# Allegro board MIPI_RGB_163.brd
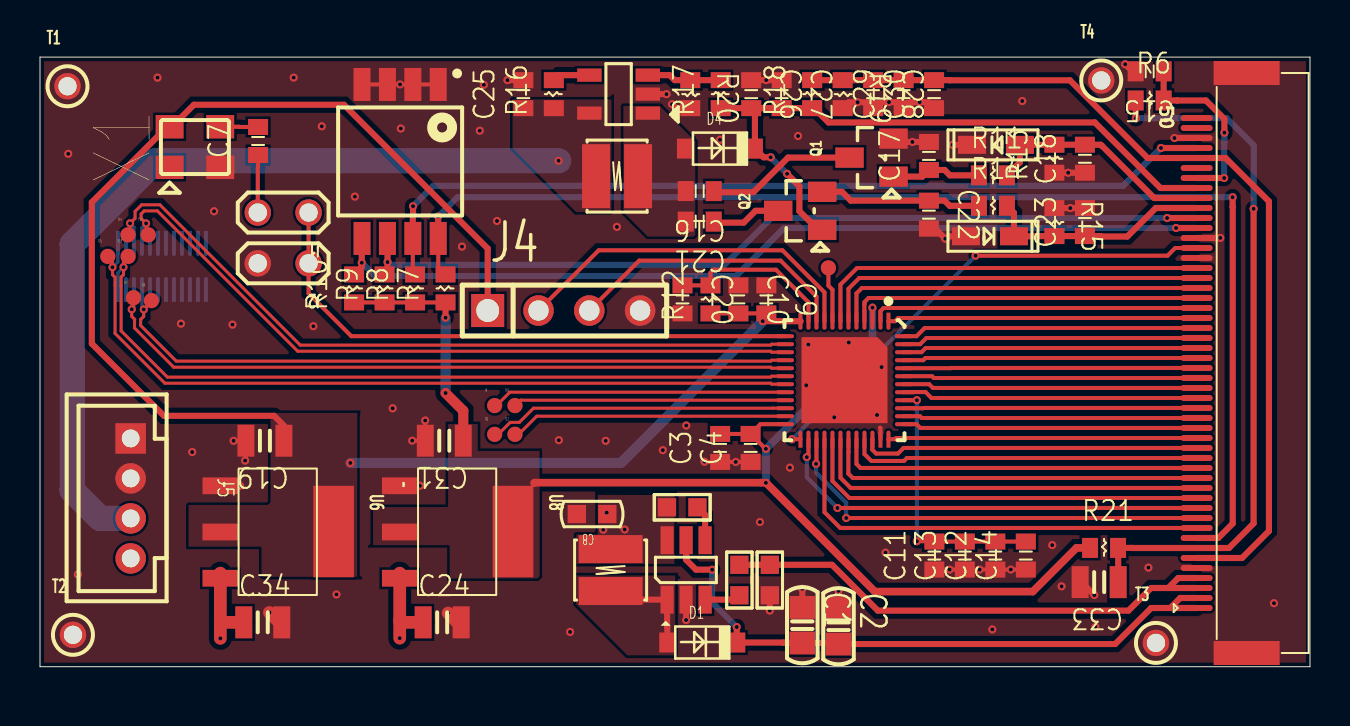
[diagram p0: board, top side]
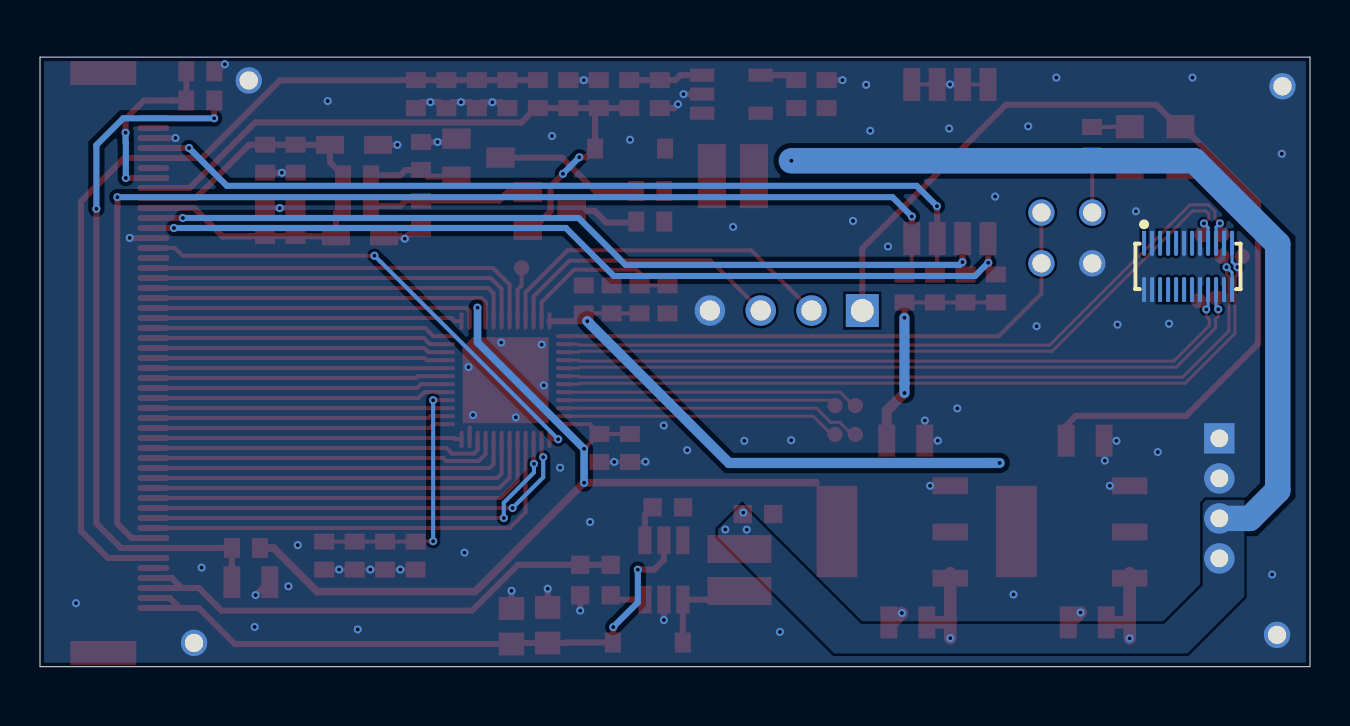
[diagram p1: board, bottom side, seen from below]

Outline 63.5 x 30.48 mm; copper layers: TOP, BOTTOM. Coordinates in mm from the lower left corner of the outline.
Outline path: 0,30.48 0,0 63.5,0 63.5,30.48 0,30.48

## Design rules (mm)
net group DSI_B0: nets DSI_B0N DSI_B0P
net group DSI_B1: nets DSI_B1N DSI_B1P
net group DSI_BC: nets DSI_BCN DSI_BCP

## Placement (name value [footprint] x y rotation side)
C1  4.7uF/1uF  [SC0805]  38.11 2.08 270 top
C2  4.7uF/1uF  [SC0805]  39.93 2.02 270 top
C3  1UF  [SMDCAP0603]  34.01 10.94 90 top
C4  10NF  [SMDCAP0603]  35.53 10.94 90 top
C7  1NF  [SMDCAP0603]  10.9 26.29 90 top
C8  4.7uF  [SC0603]  28.37 7.63 180 top
C9  1UF  [SMDCAP0603]  36.32 18.37 270 top
C10  10NF  [SMDCAP0603]  34.92 18.37 270 top
C11  1UF  [SMDCAP0603]  44.72 5.56 90 top
C12  1UF  [SMDCAP0603]  47.77 5.56 90 top
C13  10NF  [SMDCAP0603]  46.24 5.56 90 top
C14  10NF  [SMDCAP0603]  49.29 5.56 90 top
C15  1.0uF  [SMDCAP0603]  55.48 29.77 180 top
C16  100nF  [SMDCAP0603]  32.99 23.78 180 top
C17  1.0uF  [SMDCAP0603]  44.45 25.54 90 top
C18  100nF  [SMDCAP0603]  52.25 25.4 90 top
C19  10UF  [SMDCAP0805]  11.24 11.3 180 top
C20  200NF  [SMDCAP0603]  32.13 18.37 270 top
C21  100nF  [SMDCAP0603]  32.99 22.26 180 top
C22  1.0uF  [SMDCAP0603]  44.45 22.6 270 top
C23  1.0uF  [SMDCAP0603]  52.25 22.23 90 top
C24  10UF  [SMDCAP0805]  20.11 2.22 0 top
C25  1.0uF  [SMDCAP0603]  24.17 28.63 90 top
C26  1.0uF  [SMDCAP0603]  35.56 28.63 270 top
C27  100nF  [SMDCAP0603]  37.08 28.63 270 top
C28  4.7uF  [SMDCAP0603]  41.66 28.63 270 top
C29  100nF  [SMDCAP0603]  43.18 28.63 90 top
C30  100nF  [SMDCAP0603]  44.7 28.63 90 top
C31  10UF  [SMDCAP0805]  20.21 11.3 180 top
C33  10UF  [SMDCAP0805]  52.96 4.23 180 top
C34  10UF  [SMDCAP0805]  11.14 2.22 0 top
D1  IN5819HW  [SOD123]  31.36 1.21 0 top
D2  UDZS6.8B  [SOD-323]  47.8 26.09 270 top
D3  UDZS18B  [SOD-323]  47.5 21.52 90 top
D4  IN5819HW  [SOD123]  32.25 25.91 0 top
J1  JUMPER  [JUMPER_2_54]  12.16 22.71 180 top
J2  JUMPER  [JUMPER_2_54]  12.16 20.17 180 top
J3  F4C50U-A1XD-R  [FPC50-0_5-4_428_1-B]  59.08 15.19 270 top
J4  CON4  [SIP4_2_54]  22.38 17.81 0 top
J5  CON4  [HDR1X4_2]  3.83 4.41 270 top
L1  22uH  [PL3030]  28.53 4.83 270 top
L2  22uH  [PL3030]  28.86 24.53 0 top
NOREF  -  []  0 30.48 0 top
NOREF#2  -  []  0 0 90 top
Q1  BAT54S  [SOT-23]  41.58 25.45 90 top
Q2  BAT54S  [SOT-23]  38.01 22.79 90 top
R2  10K  [SR0603]  31.35 7.97 0 top
R4  4.7K  [SR0603]  34.97 3.57 90 top
R5  3.3  [SR0603]  36.49 5.09 270 top
R6  10K  [SMDRES0603]  55.48 28.31 0 top
R7  10K  [SMDRES0603]  20.28 18.91 90 top
R8  10K  [SMDRES0603]  18.75 18.91 90 top
R9  10K  [SMDRES0603]  17.23 18.91 90 top
R10  10K  [SMDRES0603]  15.71 18.91 90 top
R11  1K  [SMDRES0603]  47.65 24.57 0 top
R12  1K  [SMDRES0603]  33.52 18.37 90 top
R13  10K  [SMDRES0603]  50.72 25.4 90 top
R14  1K  [SMDRES0603]  47.65 23.04 0 top
R15  47K  [SMDRES0603]  50.72 22.23 270 top
R16  10K  [SMDRES0603]  25.69 28.63 90 top
R17  33K,1%  [SMDRES0603]  34.04 28.63 90 top
R18  56K,1%  [SMDRES0603]  38.61 28.63 90 top
R19  33K,1%  [SMDRES0603]  40.13 28.63 270 top
R20  4.7K,1%  [SMDRES0603]  32.51 28.63 270 top
R21  0  [SMDRES0603]  53.2 5.94 0 top
SW1  SWITCH_SMT4  [SW_4BIT_1_27]  18.01 25.26 270 top
T1  TEST POINT  [TEST_POINT]  1.38 29.02 0 top
T2  TEST POINT  [TEST_POINT]  1.65 1.59 0 top
T3  TEST POINT  [TEST_POINT]  55.8 1.19 0 top
T4  TEST POINT  [TEST_POINT]  53.06 29.31 0 top
T8  TEST POINT  [TP_30]  39.42 19.94 0 top
T9  TEST POINT  [TP_30]  22.73 13.06 0 top
T10  TEST POINT  [TP_30]  23.75 13.06 0 top
T11  TEST POINT  [TP_30]  22.73 11.62 0 top
T12  TEST POINT  [TP_30]  23.75 11.62 0 top
T13  TEST POINT  [TP_30]  5.41 21.59 0 top
T14  TEST POINT  [TP_30]  4.4 21.59 0 top
T15  TEST POINT  [TP_30]  3.39 20.52 0 top
T16  TEST POINT  [TP_30]  5.57 18.31 0 top
T17  TEST POINT  [TP_30]  4.68 18.45 0 top
T18  TEST POINT  [TP_30]  4.41 20.52 0 top
U1  AP3031KTR-G  [SOT-23-6]  32.3 4.84 0 top
U6  1117_1.8  [SOT223]  9.02 9.05 270 top
U7  AP3012  [SOT-23-5]  28.93 28.63 90 top
U8  1117_3.3  [SOT223]  17.99 9.05 270 top
U10  ICN6211  [QFN48_04]  40.22 14.33 270 top
U11  -  [DF37NC_24]  6.1 20.02 90 bottom
X1  CRYSTAL_4pin  [CRY4_3225]  7.75 25.98 90 top

## Library data of the parts
C1-C4 C7-C31 C33 C34 = CAP
D1 D4 = Diode_Schottky
D2 D3 = Diode_zener
J1 J2 = JUMPER
J3 = J_FPC-50P
J4 J5 = CON4
L1 L2 = Inductor
Q1 Q2 = Diode_SOT23
R2 R4-R11 R13-R21 = RES
R12 = RESISTOR
SW1 = SWITCH_SMT4
T1-T4 T8-T18 = TEST POINT
U1 = U_AP3031
U6 U8 = 1117
U7 = U_AP3012
U10 = ICN6211
U11 = DF37NC_0
X1 = CRYSTAL_4pin

## Footprints (pads in the part's own frame, mm; a bottom-side part is the same pattern mirrored in y, then rotated)
CRY4_3225
  rect 1.168x1.397 smd: 1(-1.015,1.265) 2(-1.015,-1.265) 3(1.015,-1.265) 4(1.015,1.265)
DF37NC_24
  custom 1.25x0.2 smd: 1(1.15,2.2) 2(1.15,1.8) 3(1.15,1.4) 4(1.15,1) 5(1.15,0.6) 6(1.15,0.2) 7(1.15,-0.2) 8(1.15,-0.6) 9(1.15,-1) 10(1.15,-1.4) 11(1.15,-1.8) 12(1.15,-2.2) 13(-1.15,-2.2) 14(-1.15,-1.8) 15(-1.15,-1.4) 16(-1.15,-1) 17(-1.15,-0.6) 18(-1.15,-0.2) 19(-1.15,0.2) 20(-1.15,0.6) 21(-1.15,1) 22(-1.15,1.4) 23(-1.15,1.8) 24(-1.15,2.2)
FPC50-0_5-4_428_1-B
  oval 0.3x1.6 smd: 1(12.25,-1.25) 2(11.75,-1.25) 3(11.25,-1.25) 4(10.75,-1.25) 5(10.25,-1.25) 6(9.75,-1.25) 7(9.25,-1.25) 8(8.75,-1.25) 9(8.25,-1.25) 10(7.75,-1.25) 11(7.25,-1.25) 12(6.75,-1.25) 13(6.25,-1.25) 14(5.75,-1.25) 15(5.25,-1.25) 16(4.75,-1.25) 17(4.25,-1.25) 18(3.75,-1.25) 19(3.25,-1.25) 20(2.75,-1.25) 21(2.25,-1.25) 22(1.75,-1.25) 23(1.25,-1.25) 24(0.75,-1.25) 25(0.25,-1.25) 26(-0.25,-1.25) 27(-0.75,-1.25) 28(-1.25,-1.25) 29(-1.75,-1.25) 30(-2.25,-1.25) 31(-2.75,-1.25) 32(-3.25,-1.25) 33(-3.75,-1.25) 34(-4.25,-1.25) 35(-4.75,-1.25) 36(-5.25,-1.25) 37(-5.75,-1.25) 38(-6.25,-1.25) 39(-6.75,-1.25) 40(-7.25,-1.25) 41(-7.75,-1.25) 42(-8.25,-1.25) 43(-8.75,-1.25) 44(-9.25,-1.25) 45(-9.75,-1.25) 46(-10.25,-1.25) 47(-10.75,-1.25) 48(-11.25,-1.25) 49(-11.75,-1.25) 50(-12.25,-1.25)
  rect 1.2x3.3 smd: 51(-14.5,1.25) 52(14.5,1.25)
HDR1X4_2
  rect 1.524x1.524 hole 0.889: 1(-7,0.7)
  round 1.524 hole 0.889: 2(-5,0.7) 3(-3,0.7) 4(-1,0.7)
JUMPER_2_54
  round 1.321 hole 0.914: 1(-1.27,0) 2(1.27,0)
PL3030
  rect 1.4x3.2 smd: 1(-1.05,0) 2(1.05,0)
QFN48_04
  custom 0.85x0.2 smd: 1(-2.95,2.2) 2(-2.95,1.8) 3(-2.95,1.4) 4(-2.95,1) 5(-2.95,0.6) 6(-2.95,0.2) 7(-2.95,-0.2) 8(-2.95,-0.6) 9(-2.95,-1) 10(-2.95,-1.4) 11(-2.95,-1.8) 12(-2.95,-2.2) 25(2.95,-2.2) 26(2.95,-1.8) 27(2.95,-1.4) 28(2.95,-1) 29(2.95,-0.6) 30(2.95,-0.2) 31(2.95,0.2) 32(2.95,0.6) 33(2.95,1) 34(2.95,1.4) 35(2.95,1.8) 36(2.95,2.2)
  custom 0.2x0.85 smd: 13(-2.2,-2.95) 14(-1.8,-2.95) 15(-1.4,-2.95) 16(-1,-2.95) 17(-0.6,-2.95) 18(-0.2,-2.95) 19(0.2,-2.95) 20(0.6,-2.95) 21(1,-2.95) 22(1.4,-2.95) 23(1.8,-2.95) 24(2.2,-2.95) 37(2.2,2.95) 38(1.8,2.95) 39(1.4,2.95) 40(1,2.95) 41(0.6,2.95) 42(0.2,2.95) 43(-0.2,2.95) 44(-0.6,2.95) 45(-1,2.95) 46(-1.4,2.95) 47(-1.8,2.95) 48(-2.2,2.95)
  custom 4.3x4.3 smd: 49(0,0)
SC0603
  rect 0.914x0.914 smd: 1(0,0) 2(1.524,0)
SC0805
  rect 1.143x1.27 smd: 1(-0.889,0) 2(0.889,0)
SIP4_2_54
  rect 1.651x1.651 hole 1.143: 1(0,0)
  round 1.524 hole 1.016: 2(2.54,0) 3(5.08,0) 4(7.62,0)
SMDCAP0603
  rect 0.8x1 smd: 1(-0.7,0) 2(0.7,0)
SMDCAP0805
  rect 0.85x1.6 smd: 1(-0.95,0) 2(0.95,0)
SMDRES0603
  rect 0.8x1 smd: 1(-0.7,0) 2(0.7,0)
SOD123
  rect 0.8x1 smd: 1(0,0) 2(3.5,0)
SOD-323
  rect 0.9x1.4 smd: 1(0,1.2) 2(0,-1.2)
SOT223
  rect 0.838x1.778 smd: 1(0,0) 2(2.311,0) 3(4.623,0)
  rect 4.572x2.032 smd: 4(2.286,5.664)
SOT-23
  rect 1.016x1.422 smd: 1(-0.95,-1.1) 2(0.95,-1.1) 3(0,1.1)
SOT-23-5
  rect 0.66x1.219 smd: 1(-0.95,-1.46) 2(0,-1.46) 3(0.95,-1.46) 4(0.95,1.46) 5(-0.95,1.46)
SOT-23-6
  rect 0.66x1.397 smd: 1(-0.94,-1.486) 2(0.01,-1.486) 3(0.96,-1.486) 4(0.96,1.486) 5(0.01,1.486) 6(-0.94,1.486)
SR0603
  rect 0.914x0.914 smd: 1(0,0) 2(1.524,0)
SW_4BIT_1_27
  rect 1.65x0.85 smd: 1(-3.85,1.905) 2(-3.85,0.635) 3(-3.85,-0.635) 4(-3.85,-1.905) 5(3.85,-1.905) 6(3.85,-0.635) 7(3.85,0.635) 8(3.85,1.905)
TEST_POINT
  round 1.321 hole 0.914: 1(0,0)
TP_30
  round 0.762 smd: 1(0,0)

## Nets
1V8: C9.2 C10.2 C19.1 J4.1 R12.1 U6.2(OUT_1) U6.4(OUT_2) U10.12(VDD1) X1.4(VDD)
3V3: C3.2 C4.2 C31.1 R7.1 R8.1 R9.1 R10.1 R21.1 U8.2(OUT_1) U8.4(OUT_2) U10.3(VDD3) U10.24(VDD2)
GND: C1.1 C2.1 C3.1 C4.1 C8.2 C9.1 C10.1 C11.1 C12.1 C13.1 C14.1 C15.2 C17.2 C18.1 C19.2 C20.2 C22.2 C23.2 C24.2 C25.2 C26.1 C27.1 C28.2 C29.1 C30.1 C31.2 C33.2 C34.2 D2.2 D3.1 J2.2 J3.5 J3.36 J3.38 J3.48 J3.51 J3.52 J4.4 J5.1 J5.2 Q1.2 R5.2 R13.1 R15.1 R19.2 R20.2 SW1.1 SW1.2 SW1.3 SW1.4 T1.1 T2.1 T3.1 T4.1 U1.2(GND) U6.1(ADJ/GND) U7.2(GND) U8.1(ADJ/GND) U10.35(GND) U10.49(E_PAD) U11.2 U11.6 U11.8 U11.11 U11.14 U11.17 U11.23 U11.24 X1.2(GND)
VCC_5V: C8.1 C24.1 C25.1 C34.1 J5.3 J5.4 L1.1 L2.1 R2.1 R16.1 U1.6(VIN) U6.3(IN) U7.5(VIN) U8.3(IN)
DATA_DE: J3.9 U10.28(DATA_DE)
DITH: J3.47 R8.2 SW1.7
DSI_B0N: T13.1 U10.15(DA0N) U11.9
DSI_B0P: T14.1 U10.14(DA0P) U11.10
DSI_B1N: T17.1 U10.17(DA1N) U11.15
DSI_B1P: T16.1 U10.16(DA1P) U11.16
DSI_BCN: T15.1 U10.19(DACN) U11.12
DSI_BCP: T18.1 U10.18(DACP) U11.13
HSYNC: J3.11 U10.26(HSYNC)
LCD_AVDD: C26.2 C27.2 D4.2(-) J3.43 Q2.1(G) R17.1 R18.1
LCD_RST: C15.1 J3.44 R6.2
LCD_VCOM: C28.1 C29.2 C30.2 J3.6 J3.46 R18.2 R19.1
LCD_VGH: C23.1 D3.2 J3.41 R14.2 R15.2
LCD_VGL: C18.2 D2.1 J3.42 R11.2 R13.2
MODE: J3.8 R7.2 SW1.8
PANEL_VDD: C33.1 J3.7 R6.1 R21.2
PCLK: J3.37 U10.25(PCLK)
REFCLK: J1.1 J2.1 U10.13(REF_CLK)
RESET: C20.1 R12.2 U10.11(EN)
RGB_DATA0: J3.12 U10.29(DATA0)
RGB_DATA1: J3.13 U10.30(DATA1)
RGB_DATA2: J3.14 U10.31(DATA2)
RGB_DATA3: J3.15 U10.32(DATA3)
RGB_DATA4: J3.16 U10.33(DATA4)
RGB_DATA5: J3.17 U10.34(DATA5)
RGB_DATA6: J3.18 U10.36(DATA6)
RGB_DATA7: J3.19 U10.37(DATA7)
RGB_DATA8: J3.20 U10.38(DATA8)
RGB_DATA9: J3.21 U10.39(DATA9)
RGB_DATA10: J3.22 U10.41(DATA10)
RGB_DATA11: J3.23 U10.42(DATA11)
RGB_DATA12: J3.24 U10.43(DATA12)
RGB_DATA13: J3.25 U10.44(DATA13)
RGB_DATA14: J3.26 U10.45(DATA14)
RGB_DATA15: J3.27 U10.46(DATA15)
RGB_DATA16: J3.28 U10.47(DATA16)
RGB_DATA17: J3.29 U10.48(DATA17)
RGB_DATA18: J3.30 U10.1(DATA18)
RGB_DATA19: J3.31 U10.2(DATA19)
RGB_DATA20: J3.32 U10.4(DATA20)
RGB_DATA21: J3.33 U10.5(DATA21)
RGB_DATA22: J3.34 U10.6(DATA22)
RGB_DATA23: J3.35 U10.7(DATA23)
SCL: J4.2 U10.9(SCL)
SDA: J4.3 U10.10(SDA)
SHLR: J3.39 R10.2 SW1.5
UPDN: J3.40 R9.2 SW1.6
VLED+: C1.2 C2.2 D1.2(-) J3.1 J3.2 U1.5(OVP)
VLED-: J3.3 J3.4 R4.2 R5.1
VSYNC: J3.10 U10.27(VSYNC)
N16776933: C7.2 X1.3(OUT)
N16776937: C7.1 J1.2
N16777143: D1.1(+) L1.2 U1.1(LX)
N16777199: R4.1 U1.3(FB)
N16777260: R2.2 U1.4(EN)
N16777403: T8.1 U10.8(TEST)
N16777626: C11.2 C12.2 C13.2 C14.2 U10.40(VCORE)
N16778328: C22.1 Q2.2 R14.1
N16778388: C17.1 Q1.1(G) R11.1
N16778390: R17.2 R20.1 U7.3(FB)
N16778392: C21.1 Q2.3
N16778398: C16.2 C21.2 D4.1(+) L2.2 U7.1(SW)
N16778500: R16.2 U7.4(S\H\D\N\)
N16778756: C16.1 Q1.3
N16796361: T9.1 U10.20(DA2P)
N16796365: T10.1 U10.21(DA2N)
N16796369: T11.1 U10.22(DA3P)
N16796373: T12.1 U10.23(DA3N)

Pads without a net: J3 45 49 50; U11 1 3 4 5 7 18 19 20 21 22; X1 1

## Via types
v1: diameter 0.406, hole 0.203, TOP to BOTTOM, 119 vias

## Routing (per net, layer and track width the routed paths; a pad name or vN(x,y) marks a point on that pad's centre or on a via; arc(x,y) is an arc through that point)
1V8: length 75
  TOP w0.203: v1(36.14,17.28) 36.14,17.49 C9.2 C10.2 R12.1
  TOP w0.305: 12.19,12.06 11.71,12.54 6.2,12.54 2.59,16.15 2.59,23.22 6.37,27 X1.4 6.59,27 7.69,28.1 15.2,28.1 22.38,20.91 J4.1 ; v1(36.14,17.28) U10.12
  BOTTOM w0.508: v1(36.14,17.28) 29.05,10.19 16.1,10.19 v1(15.52,10.19)
3V3: length 59.3
  TOP w0.203: R10.1 R9.1 R8.1 R7.1 ; 36.03,9.2 36.04,9.19 v1(36.3,9.19) ; C4.2 36.02,12.13 U10.24 ; C4.2 36.28,10.89 v1(36.3,10.89) ; C4.2 C3.2 ; U10.3 v1(41.62,17.95)
  TOP w0.305: R7.1 v1(20.28,17.45)
  TOP w0.381: R21.1 51.82,5.94 49.64,3.75 41.75,3.75 36.3,9.2 24.73,9.2 24.7,9.18
  TOP w0.508: C31.1 21.16,12.8 v1(20.28,13.68)
  BOTTOM w0.381: v1(41.62,17.95) 41.62,16.22 v1(36.3,10.89) v1(36.3,9.19)
  BOTTOM w0.508: v1(20.28,13.68) 20.28,14.17 v1(20.28,17.45)
GND: length 43.3
  TOP w0.203: C11.1 v1(45.48,4.86) C13.1 v1(46.98,4.86) C12.1 v1(48.54,4.86) C14.1 ; U10.35 42.02,11.93 42,11.96 ; v1(10.26,10.3) 10.29,10.34 C19.2 9.68,11.3 v1(9.68,11.29) ; SW1.4 SW1.3 18,29.11 v1(18,29.12) 18,29.11 SW1.2 SW1.1 ; v1(18.99,9.05) U8.1 ; v1(19.26,12.31) 19.26,12.3 C31.2 18.61,11.3 v1(18.61,11.3) ; C4.1 v1(34.79,10.24) C3.1 33.24,10.24 v1(33.23,10.25) ; U6.1 v1(10.01,9.05)
  TOP w0.305: Q1.2 42.84,26.24 v1(43.62,26.24) C17.2 ; C1.1 v1(38.11,3.9) ; R19.2 40.15,27.93 40.44,28.22 v1(40.88,28.22) 41.36,28.22 C28.2 41.71,27.93 42.01,28.23 v1(42.45,28.23) 42.88,28.23 C29.1 43.23,27.93 43.53,28.23 v1(43.98,28.23) 44.4,28.23 C30.1 ; D2.2 v1(45.63,26.09) ; C22.2 44.76,21.9 v1(45.26,21.4) 45.34,21.4 45.46,21.52 D3.1 ; C33.2 52.07,4.23 v1(52.72,3.58) ; R20.2 31.79,27.93 v1(31.6,28.12) ; v1(54.26,30.12) 54.61,29.77 C15.2 ; J3.38 59.01,21.44 v1(59.02,21.44) ; C25.2 v1(23.37,29.33) ; C18.1 v1(51.41,24.7) R13.1 ; C27.1 v1(36.31,29.33) C26.1 ; C2.1 v1(39.93,3.79) ; R5.2 v1(36.49,2.8) ; R15.1 v1(51.52,22.93) C23.2 ; U1.2 v1(32.31,2.33) ; J3.48 v1(56.72,26.44) ; U7.2 v1(31.32,28.63)
  TOP w0.635: v1(11.47,2.71) 11.96,2.22 C34.2 ; v1(20.41,2.68) 20.87,2.22 C24.2
  vias: v1(1.41,25.64) v1(1.89,4.61) v1(5.88,29.45) v1(7.05,17.15) v1(7.61,10.73) v1(8.7,22.77) v1(9.62,17.1) v1(12.68,29.45) v1(13.67,17.03) v1(14.09,27.02) v1(14.82,3.61) v1(15.74,23.51) v1(17.63,12.92) v1(18.04,26.91) v1(21.1,21.01) v1(21.99,26.8) v1(22.19,29.1) v1(22.85,22.29) v1(25.94,11.33) v1(26.5,1.74) v1(28.28,11.29) v1(28.85,21.99) v1(31.14,10.83) v1(32.31,12.06) v1(34,26.35) v1(36,7.23) v1(37.5,9.95) v1(37.9,26.53) v1(38.31,14.07) v1(38.42,16.11) v1(39.71,12.47) v1(40.44,16.21) v1(41.85,12.59) v1(42.08,14.98) v1(42.27,5.7) v1(47.61,1.86) v1(49.11,28.28) v1(50.61,6.08) v1(51.08,4.02) v1(52.77,1.99) v1(55.42,4.96) v1(61.7,3.17)
VCC_5V: length 50.8
  TOP w0.635: 9.02,2.19 U6.3 9.02,4.68 ; 9.02,2.19 9.04,2.22 C34.1 ; 9.02,2.19 v1(9.02,1.42) ; 17.99,2.3 18.07,2.22 C24.1 ; 17.99,2.3 U8.3 17.99,4.68 ; 17.99,2.3 v1(17.99,1.43)
  BOTTOM w1.27: J5.3 3.01,7.41 1.61,8.81 1.61,21.13 5.78,25.3 v1(25.93,25.3)
  vias: v1(28.16,6.85) v1(28.34,7.71) v1(29.23,6.86)
DATA_DE: length 22.6
  TOP w0.203: U10.28 39.22,7.73 40.02,6.94 J3.9
DITH: length 43.8
  TOP w0.203: SW1.7 18.64,19.73 R8.2
  TOP w0.305: v1(18.65,23.03) 18.65,22.54 18.64,22.53 SW1.7 ; J3.47 v1(56.05,25.94)
  BOTTOM w0.305: v1(56.05,25.94) 54.16,24.04 19.67,24.04 v1(18.65,23.03)
DSI_B0N: length 37.5
  TOP w0.152: U10.15 36.58,15.73 36.54,15.77 12.89,15.77 5.87,22.79 5.21,22.79 5.06,22.64 5.06,22.41 v1(5.3,22.16) 5.3,22.16 5.3,21.77 5.41,21.66 T13.1
  BOTTOM w0.152: U11.9 5.1,21.96 v1(5.3,22.16)
DSI_B0P: length 38
  TOP w0.152: T14.1 4.4,21.67 4.5,21.77 4.5,22.17 v1(4.5,22.17) 4.75,22.42 4.75,22.77 5.08,23.1 6,23.1 13.01,16.08 36.54,16.08 36.59,16.13 U10.14
  BOTTOM w0.152: U11.10 4.7,21.97 v1(4.5,22.17)
DSI_B1N: length 36
  TOP w0.152: T17.1 4.68,17.96 v1(4.59,17.87) 4.58,17.52 4.73,17.37 4.72,16.94 6.69,14.97 36.54,14.97 36.59,14.93 U10.17
  BOTTOM w0.152: U11.15 4.7,17.98 4.59,17.87 v1(4.59,17.87)
DSI_B1P: length 35.5
  TOP w0.152: T16.1 5.57,18.25 v1(5.19,17.86) 5.18,17.51 5.03,17.37 5.03,17.06 6.81,15.28 36.54,15.28 36.58,15.33 U10.16
  BOTTOM w0.152: U11.16 5.1,17.96 v1(5.19,17.86)
DSI_BCN: length 39.9
  TOP w0.152: T15.1 3.63,20.28 v1(3.63,19.97) 3.63,19.6 3.75,19.48 3.75,19.07 3.75,16.66 6.24,14.17 36.54,14.17 36.58,14.13 U10.19
  BOTTOM w0.152: v1(3.63,19.97) 3.63,19.97 3.9,20.24 U11.12
DSI_BCP: length 39.3
  TOP w0.152: T18.1 4.17,20.28 v1(4.17,19.98) 4.18,19.6 4.06,19.48 4.06,19.07 4.06,16.79 6.37,14.48 36.54,14.48 36.58,14.53 U10.18
  BOTTOM w0.152: U11.13 3.9,19.7 v1(4.17,19.98)
HSYNC: length 22.1
  TOP w0.203: J3.11 v1(39.87,7.94) ; v1(38.34,10.48) 38.42,10.56 U10.26
  BOTTOM w0.203: v1(39.87,7.94) 38.34,9.47 v1(38.34,10.48)
LCD_AVDD: length 33.3
  TOP w0.305: C26.2 C27.2 R18.1 38.71,27.93 39.43,27.21 52.74,27.21 56.02,23.94 J3.43 ; C26.2 R17.1 ; C26.2 35.75,27.74 D4.2 36.18,25.47 v1(36.53,25.47) ; Q2.1 38.91,21.84 37.97,22.78 37.97,24.01 37.7,24.29 37.7,24.3 v1(37.35,24.65)
  BOTTOM w0.305: v1(36.53,25.47) 37.01,24.99 37.01,24.99 v1(37.35,24.65)
LCD_RST: length 9.2
  TOP w0.305: J3.44 v1(59.21,24.44) ; C15.1 R6.2 56.86,28.31 56.87,28.31 58.3,28.31 59.22,27.39 v1(59.22,26.7)
  BOTTOM w0.305: v1(59.22,26.7) 59.22,26.22 59.21,26.21 v1(59.21,24.44)
LCD_VCOM: length 46
  TOP w0.305: R18.2 R19.1 C28.1 C29.2 C30.2 45.48,29.33 45.49,29.32 51.5,29.32 55.38,25.44 J3.46 59.28,25.44 61.45,23.26 61.45,6.78 60.1,5.44 J3.6
LCD_VGH: length 11.4
  TOP w0.305: J3.41 55.79,22.94 54.36,21.51 53.05,21.51 53.03,21.53 C23.1 R15.2 49.94,21.53 49.93,21.52 D3.2 48.7,22.69 R14.2
LCD_VGL: length 11.7
  TOP w0.305: J3.42 55.71,23.44 53.09,26.06 53.07,26.06 53.03,26.1 C18.2 R13.2 50.72,26.09 D2.1 49,25.22 R11.2
MODE: length 61.6
  TOP w0.203: SW1.8 19.91,19.98 R7.2
  TOP w0.305: v1(19.91,22.51) 19.91,21.42 SW1.8 ; v1(59.63,23.48) 59.63,22.99 59.64,22.99 59.64,7.16 58.91,6.44 J3.8
  BOTTOM w0.305: v1(59.63,23.48) 20.87,23.48 v1(19.91,22.51)
PANEL_VDD: length 35.3
  TOP w0.305: R6.1 54.79,28.3 v1(54.79,27.42) ; C33.1 53.91,5.93 R21.2 54.58,5.94 54.59,5.94 J3.7 59.45,5.94 60.68,7.17 v1(60.68,22.89)
  BOTTOM w0.305: v1(60.68,22.89) 60.68,26.08 59.34,27.42 v1(54.79,27.42)
PCLK: length 24.6
  TOP w0.203: v1(46.78,20.55) 56.37,20.55 56.76,20.94 J3.37 ; v1(37.59,11.37) 37.67,11.37 37.67,11.38 U10.25
  BOTTOM w0.203: v1(46.78,20.55) 46.47,20.24 46.46,20.24 v1(37.59,11.37)
REFCLK: length 28.8
  TOP w0.203: U10.13 15.57,16.53 13.43,18.66 J2.1 J1.1
RESET: length 8.6
  TOP w0.203: C20.1 R12.2 33.52,19.69 33.68,19.85 36.79,19.85 38.42,18.22 U10.11
RGB_DATA0: length 20.7
  TOP w0.203: U10.29 39.62,9.28 40.47,8.44 J3.12
RGB_DATA1: length 19.9
  TOP w0.203: J3.13 40.54,8.94 40.02,9.45 U10.30
RGB_DATA2: length 19.2
  TOP w0.203: U10.31 40.42,10.72 40.42,10.72 40.42,9.66 40.64,9.44 J3.14
RGB_DATA3: length 18.3
  TOP w0.203: U10.32 40.82,10.14 41.03,9.94 J3.15
RGB_DATA4: length 17.6
  TOP w0.203: U10.33 41.22,10.63 41.57,10.29 43.2,10.29 43.34,10.44 J3.16
RGB_DATA5: length 16.9
  TOP w0.203: J3.17 43.18,10.94 42.9,10.66 41.81,10.66 41.62,10.85 41.62,11.37 U10.34
RGB_DATA6: length 15.4
  TOP w0.203: J3.18 42.81,11.44 42.75,11.38 U10.36
RGB_DATA7: length 14.7
  TOP w0.203: J3.19 44.02,11.94 43.83,12.13 U10.37
RGB_DATA8: length 14.7
  TOP w0.203: J3.20 44.09,12.44 44,12.53 U10.38
RGB_DATA9: length 14.7
  TOP w0.203: U10.39 43.67,12.93 43.67,12.92 44.14,12.92 44.16,12.94 J3.21
RGB_DATA10: length 14.8
  TOP w0.203: J3.22 44.57,13.44 44.28,13.73 43.67,13.73 43.67,13.73 U10.41
RGB_DATA11: length 14.7
  TOP w0.203: J3.23 44.65,13.94 44.46,14.13 U10.42
RGB_DATA12: length 14.7
  TOP w0.203: J3.24 44.69,14.44 44.6,14.53 U10.43
RGB_DATA13: length 14.7
  TOP w0.203: J3.25 45.52,14.94 45.51,14.93 U10.44
RGB_DATA14: length 14.7
  TOP w0.203: U10.45 44.16,15.33 44.27,15.44 J3.26
RGB_DATA15: length 14.7
  TOP w0.203: J3.27 44.28,15.94 44.08,15.73 U10.46
RGB_DATA16: length 14.8
  TOP w0.203: U10.47 44.01,16.13 44.32,16.44 J3.28
RGB_DATA17: length 14.8
  TOP w0.203: J3.29 44.24,16.94 43.83,16.53 U10.48
RGB_DATA18: length 15.5
  TOP w0.203: J3.30 42.91,17.44 42.75,17.28 U10.1
RGB_DATA19: length 16.4
  TOP w0.203: J3.31 42.18,17.94 42.02,17.78 U10.2
RGB_DATA20: length 17.7
  TOP w0.203: U10.4 41.22,17.78 41.22,17.78 41.22,18.12 41.22,18.13 41.22,18.23 41.43,18.44 J3.32
RGB_DATA21: length 18.5
  TOP w0.203: U10.5 40.82,18.66 41.09,18.94 J3.33
RGB_DATA22: length 19.3
  TOP w0.203: U10.6 40.42,18.9 40.96,19.44 J3.34
RGB_DATA23: length 20
  TOP w0.203: J3.35 40.85,19.94 40.02,19.11 U10.7
SCL: length 17.9
  TOP w0.203: U10.9 39.22,18.72 37.12,20.82 27.94,20.82 J4.2
SDA: length 14.4
  TOP w0.203: J4.3 29.96,20.3 37.03,20.3 38.82,18.51 U10.10
SHLR: length 46.4
  TOP w0.203: SW1.5 16.1,20.01 16.09,20
  TOP w0.305: R10.2 16.09,20 v1(16.09,20.2) 16.09,21.4 SW1.5 ; J3.39 v1(56.8,21.94)
  BOTTOM w0.305: v1(56.8,21.94) 37.21,21.94 34.81,19.54 16.75,19.54 v1(16.09,20.2)
UPDN: length 43.3
  TOP w0.305: R9.2 17.38,19.76 v1(17.38,20.23) 17.38,21.41 SW1.6 ; J3.40 v1(56.36,22.44)
  BOTTOM w0.305: v1(56.36,22.44) 36.57,22.44 34.23,20.09 17.52,20.09 v1(17.38,20.23)
VLED+: length 31.9
  TOP w0.305: 56.51,2.94 J3.1 ; 56.51,2.94 55.56,2.94 53.76,1.13 C2.2 39.87,1.19 C1.2 37.2,1.19 37.18,1.21 D1.2 34.84,1.23 v1(34.84,1.98) ; 56.51,2.94 57.01,3.44 J3.2 ; v1(33.61,4.85) 32.8,4.85 32.31,5.35 U1.5
  BOTTOM w0.305: v1(34.84,1.98) 33.61,3.21 v1(33.61,4.85)
VLED-: length 25.9
  TOP w0.305: 56.41,3.94 55.56,3.94 54.42,2.8 41.89,2.8 39.6,5.09 R5.1 R4.2 ; 56.41,3.94 56.91,4.44 J3.4 ; 56.41,3.94 J3.3
VSYNC: length 22.1
  TOP w0.203: U10.27 38.82,10.16 v1(38.8,10.14) ; J3.10 v1(40.31,7.44)
  BOTTOM w0.203: v1(38.8,10.14) 38.8,9.71 40.31,8.2 v1(40.31,7.44)
N16776933: length 1.9
  TOP w0.203: C7.2 9.95,26.99 9.94,27 X1.3
N16776937: length 2.9
  TOP w0.203: J1.2 10.89,24.94 10.9,24.96 C7.1
N16777143: length 5.2
  TOP w0.305: D1.1 31.36,1.99 31.36,2 U1.1 28.96,3.35 L1.2
N16777199: length 1.8
  TOP w0.305: U1.3 34.75,3.35 R4.1
N16777260: length 1.8
  TOP w0.305: U1.4 33.26,7.59 R2.2
N16777403: length 2.7
  TOP w0.203: T8.1 39.42,19.05 39.62,18.85 U10.8
N16777626: length 13.2
  TOP w0.203: C14.2 C12.2 C13.2 C11.2 44.7,6.27 v1(43.84,6.27) ; U10.40 v1(43.84,13.33)
  BOTTOM w0.203: v1(43.84,13.33) 43.84,6.73 43.84,6.73 v1(43.84,6.27)
N16778328: length 8.1
  TOP w0.305: R14.1 45.49,23.04 45.23,23.3 C22.1 40.54,23.3 40.1,23.74 Q2.2
N16778388: length 4.5
  TOP w0.305: R11.1 45.5,24.57 45.23,24.84 C17.1 44.11,24.5 Q1.1
N16778390: length 3.7
  TOP w0.305: R17.2 R20.1 31.73,29.33 31.48,29.58 U7.3
N16778392: length 3.5
  TOP w0.305: Q2.3 35.78,22.79 35.19,22.2 33.74,22.2 C21.1
N16778500: length 1.9
  TOP w0.305: U7.4 25.94,29.58 R16.2
N16778756: length 7.5
  TOP w0.305: Q1.3 37.4,25.45 35.67,23.73 33.74,23.73 C16.1
N16796361: length 14.8
  TOP w0.152: T9.1 22.82,13.06 23.49,13.73 U10.20
N16796365: length 13.6
  TOP w0.152: U10.21 24.04,13.33 24.04,13.33 T10.1
N16796369: length 15.1
  TOP w0.152: U10.22 36.65,12.93 36.64,12.92 24.67,12.92 23.97,12.22 23.51,12.22 22.91,11.62 T11.1
N16796373: length 13.9
  TOP w0.152: U10.23 24.84,12.53 23.93,11.62 T12.1

## Copper pours and planes (outline as drawn; the poured copper is in the pictures)
1V8 on TOP: 15.86,12.61 15.86,4.52 15.89,4.49 11.15,4.49 11.08,4.57 11.08,5.97 11.05,6 7.43,6 7.43,8.06 7.45,8.09 11.39,8.09 11.52,8.22 11.52,12.69 15.89,12.69 15.89,12.63
3V3 on TOP: 16.63,6.08 20.43,6.08 20.48,6.03 20.48,4.41 24.87,4.41 24.98,4.52 24.98,10.79 21.9,10.79 21.89,10.79 21.89,12.13 20.41,12.13 20.41,7.98 16.68,7.98 16.65,8.01 16.65,6.11
GND on TOP: 0.2,30.28 63.3,30.28 63.3,0.2 0.2,0.2 ; 4 cut-outs
GND on BOTTOM: 0.2,30.28 63.3,30.28 63.3,0.2 0.2,0.2
VCC_5V on TOP: 26.82,5.14 26.82,6.6 26.82,6.6 27.88,6.6 27.89,6.62 27.89,8.59 28.87,8.59 28.87,8.59 31.72,8.59 31.72,5.16 31.73,5.14
VCC_5V on TOP: 23.64,28.36 28.55,28.36 28.57,28.39 28.57,22.78 28.52,22.73 26.8,22.73 23.63,25.9 23.63,28.35
VCC_5V on BOTTOM: 3.29,3.5 6.13,0.66 23.79,0.66 29.6,6.48 29.6,6.87 28.39,8.09 22.47,2.17 22.47,2.14 7.3,2.14 5.37,4.07 5.37,8.17 5.19,8.34 3.29,8.34
N16777143 on TOP: 31.76,4.52 31.76,0.64 31.69,0.57 29.37,0.57 26.8,3.13 26.8,4.56 31.74,4.56 31.78,4.52
N16778398 on TOP: 29.17,28.01 29.17,22.73 30.38,21.51 32.68,21.51 32.76,21.59 32.76,26.27 30.99,28.04 29.19,28.04

## Text on the board
DIMENSION: FIGURE | SIZE | 8.0 | 35.0 | 36.0 | 40.0 | 45.0 | DRILL CHART: TOP to BOTTOM | ALL UNITS ARE IN MILS | PLATED | QTY | 119 | 4 | 8 | 3 | 1
